# Altium PCB Pico_Main_Board.PcbDoc (part 1 of 2)
Units mil, origin at the board's own origin, x right, y up, seen from the top; angles counter-clockwise.
Board outline 4000 x 3000 mil, 2 copper layers (Top Layer, Bottom Layer); 20 components, 40 nets, 108 pads, 40 vias.
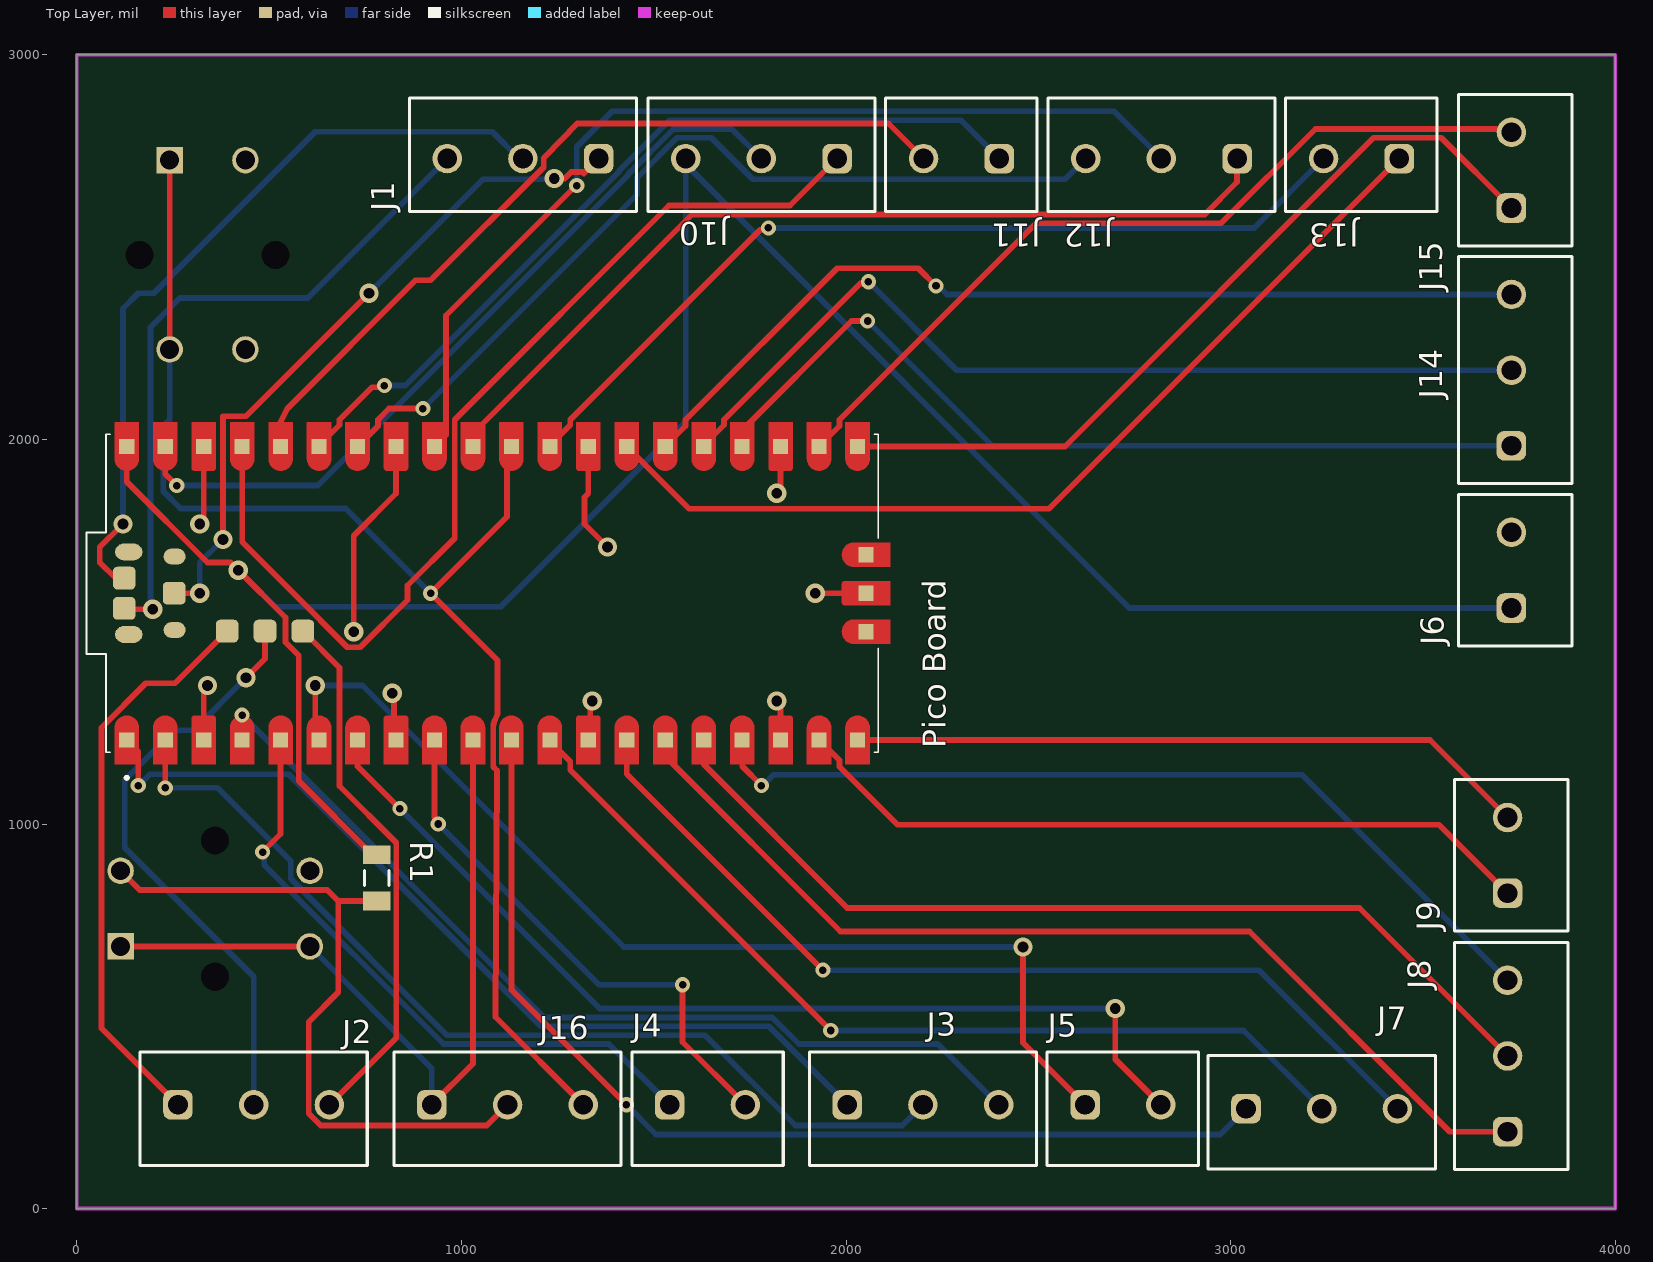
[diagram p0: Top Layer view]
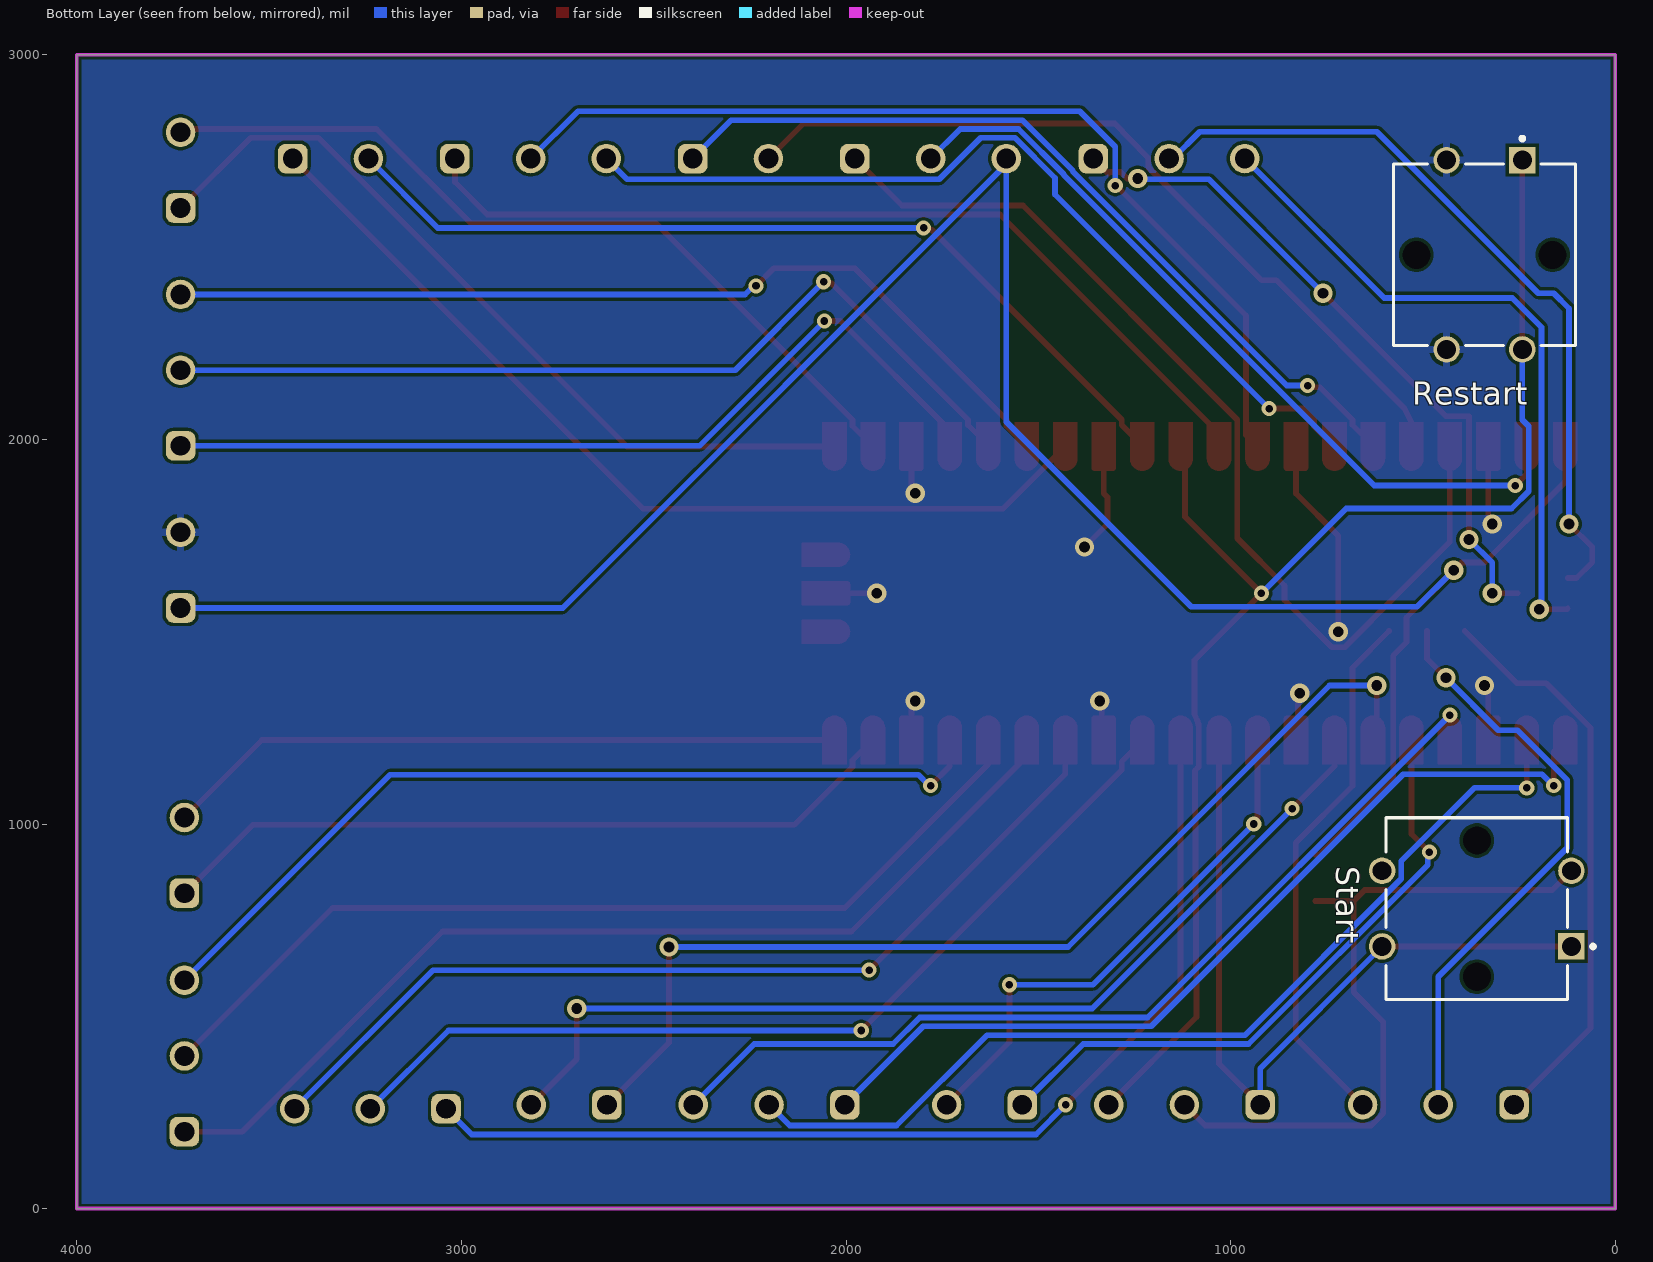
[diagram p1: Bottom Layer view, seen from below]
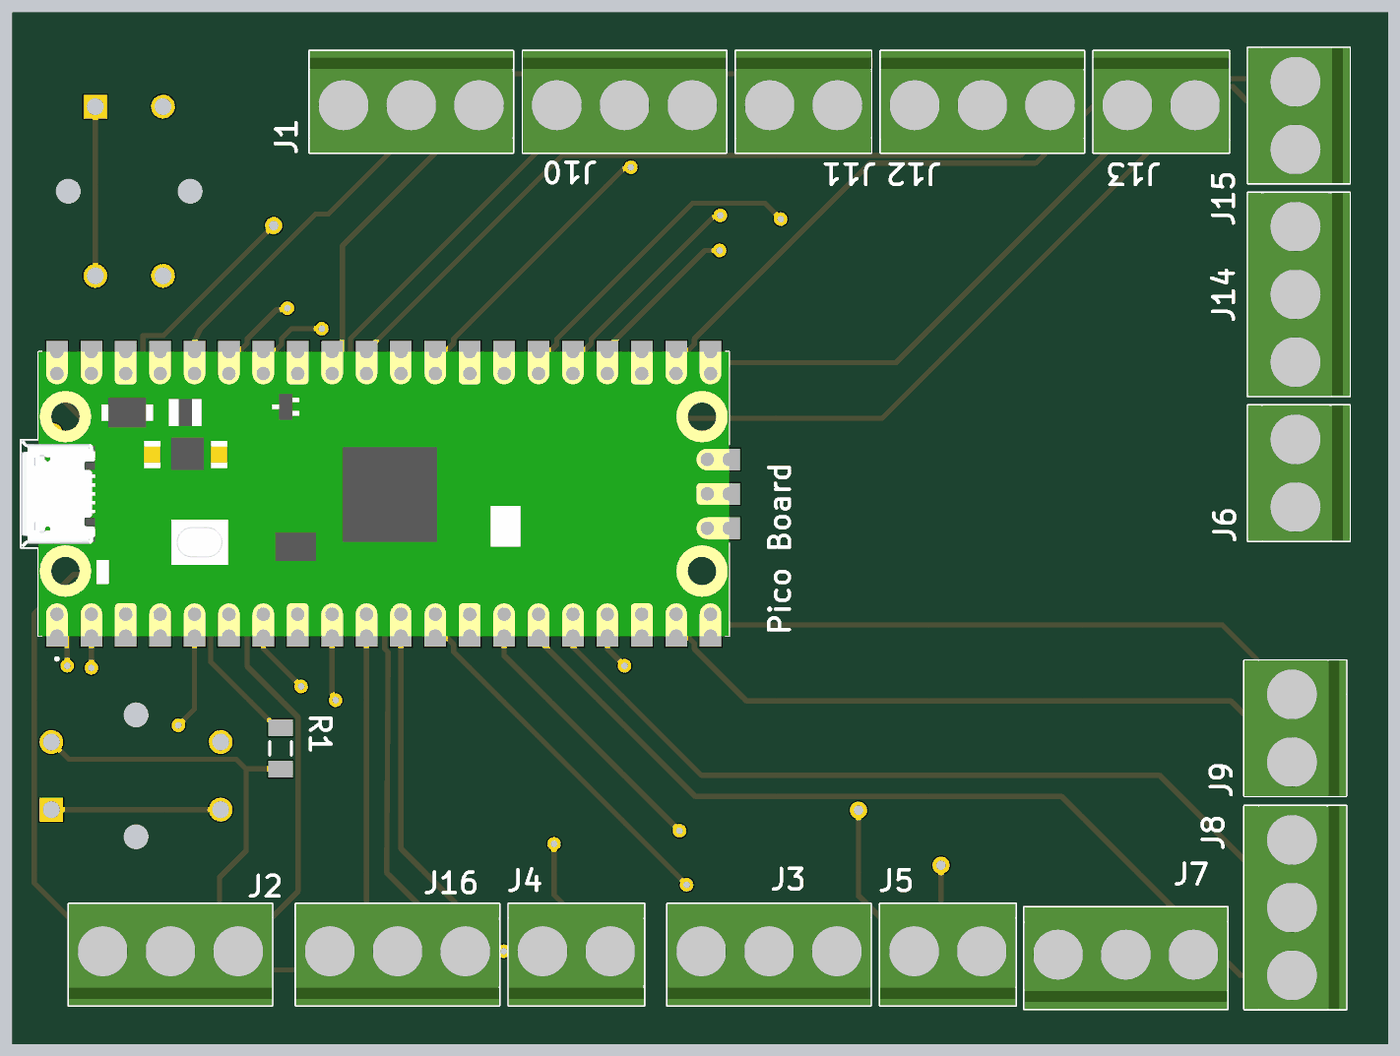
[diagram p3: 3D render of the assembled board from above, using the file's embedded part models]

## Layer stack, top to bottom
Top Solder: solder mask 0.4, Solder Resist, Dk 3.5
Top Layer: signal copper 1.4
Dielectric 1: dielectric 12.6, FR-4, Dk 4.8
Bottom Layer: signal copper 1.4
Bottom Solder: solder mask 0.4, Solder Resist, Dk 3.5

## Board outline
0,0 4000,0 4000,3000 0,3000

## Design rules (kind name [scope] priority, off if disabled: settings)
BoardOutlineClearance [All] p1: gap=7.87 ignorepadtopadclearanceinfootprint=FALSE except(15.75: Arc-SplitBarrior Arc-SplitContinuation Track-SplitBarrior Track-SplitContinuation SMDPad-SplitBarrior SMDPad-SplitContinuation THPad-SplitBarrior THPad-SplitContinuation Via-SplitBarrior Via-SplitContinuation Fill-SplitBarrior Fill-SplitContinuation Poly-SplitBarrior Poly-SplitContinuation Region-SplitBarrior Region-SplitContinuation Text-SplitBarrior Text-SplitContinuation)
Clearance "Clearance Bottom Layer" [OnLayer('Bottom Layer')] p1: gap=8 ignorepadtopadclearanceinfootprint=TRUE except(10: Arc-Text Track-Text SMDPad-Text THPad-Text Via-Text Fill-Text Poly-Text Region-Text Text-Text)
Clearance "Clearance Top Layer" [OnLayer('Top Layer')] p2: gap=8 ignorepadtopadclearanceinfootprint=TRUE except(10: Arc-Text Track-Text SMDPad-Text THPad-Text Via-Text Fill-Text Poly-Text Region-Text Text-Text)
Clearance [All] p3: gap=7.87 ignorepadtopadclearanceinfootprint=FALSE except(3.5: Arc-Arc Arc-Track Arc-SMDPad Track-Track Track-SMDPad SMDPad-SMDPad; 5: Arc-Via Track-Via SMDPad-Via THPad-Via Via-Via; 10: Arc-Text Track-Text SMDPad-Text THPad-Text Via-Text Fill-Text Poly-Text Region-Text Text-Text)
HoleSize [All] p1: absolutevalues=TRUE maxlimit=248.03 minlimit=7.87 maxpercent=80.000 minpercent=20.000
MinimumAnnularRing [All] p1: minimumring=3
MinimumSolderMaskSliver [All] p1: minsoldermaskwidth=3.94
PolygonConnect PolygonConnect_1 [All] p1: thpad.connectstyle=Relief thpad.reliefconductorwidth=20 thpad.reliefentries=4 thpad.polygonreliefangle="90 Angle" thpad.airgapwidth=10 smdpad.connectstyle=Relief smdpad.reliefconductorwidth=20 smdpad.reliefentries=4 smdpad.polygonreliefangle="90 Angle" smdpad.airgapwidth=10 via.connectstyle=Direct via.reliefconductorwidth=20 via.reliefentries=4 via.polygonreliefangle="90 Angle" via.airgapwidth=10
RoutingCorners [All] p1: cornerstyle=Round minsetback=100 maxsetback=100
RoutingVias [All] p1: holewidth=19.68 width=39.37 viastyle="Through Hole" minholewidth=7.87 minwidth=17.72 maxholewidth=39.37 maxwidth=78.74
SilkToSilkClearance [All] p1: silktosilkclearance=3.94
SilkToSolderMaskClearance [IsPad] p1: minsilkscreentomaskgap=3.94 clearancetoexposedcopper=TRUE
SolderMaskExpansion [All] p1: expansion=4 istentingtop=FALSE
Width [All] p1: maxlimit=100 minlimit=3.5 preferedwidth=15
25 further rules are at their usual default settings.

## Components (designator, comment, footprint, x,y, rotation, side; value= is the part's Value field where it differs from the comment)
J1 "691137710003" 691137710003 1160,2740 r180 top
J2 "691137710003" 691137710003 460,260 r0 top
J3 "691137710003" 691137710003 2200,260 r0 top
J4 "691137710002" 691137710002 1640,260 r0 top
J5 "691137710002" 691137710002 2720,260 r0 top
J6 "691137710002" 691137710002 3740,1660 r90 top
J7 "691137710003" 691137710003 3236.85,250.16 r0 top
J8 "691137710003" 691137710003 3729.84,396.85 r90 top
J9 "691137710002" 691137710002 3729.84,918.43 r90 top
J10 "691137710003" 691137710003 1780,2740 r180 top
J11 "691137710002" 691137710002 2300,2740 r180 top
J12 "691137710003" 691137710003 2820,2740 r180 top
J13 "691137710002" 691137710002 3340,2740 r180 top
J14 "691137710003" 691137710003 3740,2180 r90 top
J15 "691137710002" 691137710002 3740,2700 r90 top
J16 "691137710003" 691137710003 1120,260 r0 top
"Pico Board" "SC0915" MODULE_SC0915 1080,1600 r90 top
R1 "10k" RESC3116X65X40ML10T20 780,860 r270 top
Restart "B3F-4055" OMRON-B3F-4055_V 340,2480 r270 bottom
Start "B3F-4055" OMRON-B3F-4055_V 360,780 r0 bottom

## Footprints (in the part's own frame and the unit in brackets; to place one, negate y for a bottom-side part, rotate by r counter-clockwise, add the part's x,y. Pads: shape width x height; smd on the part's side, far side on the other; paste and mask are expansions set on the pad)
691137710002 [mm] "Horizontal Cable Entry with Pressure Clamp, pitch 5mm, 02p"
  rrect50% 1.95x1.95 hole 1.3: 1(-2.5,0.25)
  round 1.95 hole 1.3: 2(2.5,0.25)
  silkscreen extent -5,-3.75 5,3.75, body extent -5,-3.75 5,3.75, height 11.6
691137710003 [mm] "Horizontal Cable Entry with Pressure Clamp, pitch 5mm, 03p"
  rrect50% 1.95x1.95 hole 1.3: 1(-5,0.25)
  round 1.95 hole 1.3: 2(0,0.25) 3(5,0.25)
  silkscreen extent -7.5,-3.75 7.5,3.75, body extent -7.5,-3.75 7.5,3.75, height 11.6
MODULE_SC0915 [mm]
  rect 1x1 smd paste-1 mask+0: 1(-9.69,24.13) 2(-9.69,21.59) 3(-9.69,19.05) 4(-9.69,16.51) 5(-9.69,13.97) 6(-9.69,11.43) 7(-9.69,8.89) 8(-9.69,6.35) 9(-9.69,3.81) 10(-9.69,1.27) 11(-9.69,-1.27) 12(-9.69,-3.81) 13(-9.69,-6.35) 14(-9.69,-8.89) 15(-9.69,-11.43) 16(-9.69,-13.97) 17(-9.69,-16.51) 18(-9.69,-19.05) 19(-9.69,-21.59) 20(-9.69,-24.13) 21(9.69,-24.13) 22(9.69,-21.59) 23(9.69,-19.05) 24(9.69,-16.51) 25(9.69,-13.97) 26(9.69,-11.43) 27(9.69,-8.89) 28(9.69,-6.35) 29(9.69,-3.81) 30(9.69,-1.27) 31(9.69,1.27) 32(9.69,3.81) 33(9.69,6.35) 34(9.69,8.89) 35(9.69,11.43) 36(9.69,13.97) 37(9.69,16.51) 38(9.69,19.05) 39(9.69,21.59) 40(9.69,24.13) D1(-2.54,-24.7) D2(0,-24.7) D3(2.54,-24.7)
  oval 1.1x1.8 smd: A(-2.725,24) B(2.725,24)
  oval 1.05x1.45 smd: C(-2.425,20.97) D(2.425,20.97)
  rrect40% 1.5x1.5 smd: TP1(0,21) TP2(1,24.3) TP3(-1,24.3) TP4(-2.5,17.5) TP5(-2.5,15) TP6(-2.5,12.5)
  Top Layer region: -8.848,24.929 -8.806,24.926 -8.765,24.92 -8.724,24.913 -8.683,24.903 -8.643,24.891 -8.603,24.877 -8.565,24.861 -8.527,24.843 -8.49,24.823 -8.454,24.801 -8.42,24.777 -8.387,24.752 -8.355,24.725 -8.324,24.696 -8.295,24.665 -8.268,24.633 -8.243,24.6 -8.219,24.566 -8.197,24.53 -8.177,24.493 -8.159,24.455 -8.143,24.417 -8.129,24.377 -8.117,24.337 -8.107,24.296 -8.1,24.255 -8.094,24.214 -8.091,24.172 -8.09,24.13 -8.091,24.088 -8.094,24.046 -8.1,24.005 -8.107,23.964 -8.117,23.923 -8.129,23.883 -8.143,23.843 -8.159,23.805 -8.177,23.767 -8.197,23.73 -8.219,23.694 -8.243,23.66 -8.268,23.627 -8.295,23.595 -8.324,23.564 -8.355,23.535 -8.387,23.508 -8.42,23.483 -8.454,23.459 -8.49,23.437 -8.527,23.417 -8.565,23.399 -8.603,23.383 -8.643,23.369 -8.683,23.357 -8.724,23.347 -8.765,23.34 -8.806,23.334 -8.848,23.331 -8.89,23.33 -11.29,23.33 -11.29,24.93 -8.89,24.93
  Top Layer region: 2.582,-23.101 2.624,-23.104 2.665,-23.11 2.706,-23.117 2.747,-23.127 2.787,-23.139 2.827,-23.153 2.865,-23.169 2.903,-23.187 2.94,-23.207 2.976,-23.229 3.01,-23.253 3.043,-23.278 3.075,-23.305 3.106,-23.334 3.135,-23.365 3.162,-23.397 3.187,-23.43 3.211,-23.464 3.233,-23.5 3.253,-23.537 3.271,-23.575 3.287,-23.613 3.301,-23.653 3.313,-23.693 3.323,-23.734 3.33,-23.775 3.336,-23.816 3.339,-23.858 3.34,-23.9 3.34,-26.3 1.74,-26.3 1.74,-23.9 1.741,-23.858 1.744,-23.816 1.75,-23.775 1.757,-23.734 1.767,-23.693 1.779,-23.653 1.793,-23.613 1.809,-23.575 1.827,-23.537 1.847,-23.5 1.869,-23.464 1.893,-23.43 1.918,-23.397 1.945,-23.365 1.974,-23.334 2.005,-23.305 2.037,-23.278 2.07,-23.253 2.104,-23.229 2.14,-23.207 2.177,-23.187 2.215,-23.169 2.253,-23.153 2.293,-23.139 2.333,-23.127 2.374,-23.117 2.415,-23.11 2.456,-23.104 2.498,-23.101 2.54,-23.1
  Top Layer region: 0.621,-23.101 0.631,-23.102 0.642,-23.104 0.652,-23.107 0.662,-23.11 0.672,-23.113 0.681,-23.117 0.691,-23.122 0.7,-23.127 0.709,-23.132 0.718,-23.138 0.726,-23.145 0.734,-23.151 0.741,-23.159 0.749,-23.166 0.755,-23.174 0.762,-23.182 0.768,-23.191 0.773,-23.2 0.778,-23.209 0.783,-23.219 0.787,-23.228 0.79,-23.238 0.793,-23.248 0.796,-23.258 0.798,-23.269 0.799,-23.279 0.8,-23.29 0.8,-23.3 0.8,-26.3 -0.8,-26.3 -0.8,-23.3 -0.8,-23.29 -0.799,-23.279 -0.798,-23.269 -0.796,-23.258 -0.793,-23.248 -0.79,-23.238 -0.787,-23.228 -0.783,-23.219 -0.778,-23.209 -0.773,-23.2 -0.768,-23.191 -0.762,-23.182 -0.755,-23.174 -0.749,-23.166 -0.741,-23.159 -0.734,-23.151 -0.726,-23.145 -0.718,-23.138 -0.709,-23.132 -0.7,-23.127 -0.691,-23.122 -0.681,-23.117 -0.672,-23.113 -0.662,-23.11 -0.652,-23.107 -0.642,-23.104 -0.631,-23.102 -0.621,-23.101 -0.61,-23.1 0.61,-23.1
  Top Layer region: -2.498,-23.101 -2.456,-23.104 -2.415,-23.11 -2.374,-23.117 -2.333,-23.127 -2.293,-23.139 -2.253,-23.153 -2.215,-23.169 -2.177,-23.187 -2.14,-23.207 -2.104,-23.229 -2.07,-23.253 -2.037,-23.278 -2.005,-23.305 -1.974,-23.334 -1.945,-23.365 -1.918,-23.397 -1.893,-23.43 -1.869,-23.464 -1.847,-23.5 -1.827,-23.537 -1.809,-23.575 -1.793,-23.613 -1.779,-23.653 -1.767,-23.693 -1.757,-23.734 -1.75,-23.775 -1.744,-23.816 -1.741,-23.858 -1.74,-23.9 -1.74,-26.3 -3.34,-26.3 -3.34,-23.9 -3.339,-23.858 -3.336,-23.816 -3.33,-23.775 -3.323,-23.734 -3.313,-23.693 -3.301,-23.653 -3.287,-23.613 -3.271,-23.575 -3.253,-23.537 -3.233,-23.5 -3.211,-23.464 -3.187,-23.43 -3.162,-23.397 -3.135,-23.365 -3.106,-23.334 -3.075,-23.305 -3.043,-23.278 -3.01,-23.253 -2.976,-23.229 -2.94,-23.207 -2.903,-23.187 -2.865,-23.169 -2.827,-23.153 -2.787,-23.139 -2.747,-23.127 -2.706,-23.117 -2.665,-23.11 -2.624,-23.104 -2.582,-23.101 -2.54,-23.1
  Top Layer region: 11.29,-19.85 8.28,-19.85 8.269,-19.849 8.259,-19.848 8.248,-19.846 8.238,-19.843 8.228,-19.84 8.218,-19.837 8.209,-19.833 8.199,-19.828 8.19,-19.823 8.181,-19.818 8.172,-19.812 8.164,-19.805 8.156,-19.799 8.149,-19.791 8.141,-19.784 8.135,-19.776 8.128,-19.768 8.122,-19.759 8.117,-19.75 8.112,-19.741 8.107,-19.731 8.103,-19.722 8.1,-19.712 8.097,-19.702 8.094,-19.692 8.092,-19.681 8.091,-19.671 8.09,-19.66 8.09,-19.65 8.09,-18.45 8.09,-18.44 8.091,-18.429 8.092,-18.419 8.094,-18.408 8.097,-18.398 8.1,-18.388 8.103,-18.378 8.107,-18.369 8.112,-18.359 8.117,-18.35 8.122,-18.341 8.128,-18.332 8.135,-18.324 8.141,-18.316 8.149,-18.309 8.156,-18.301 8.164,-18.295 8.172,-18.288 8.181,-18.282 8.19,-18.277 8.199,-18.272 8.209,-18.267 8.218,-18.263 8.228,-18.26 8.238,-18.257 8.248,-18.254 8.259,-18.252 8.269,-18.251 8.28,-18.25 11.29,-18.25
  Top Layer region: 11.29,5.55 8.28,5.55 8.269,5.551 8.259,5.552 8.248,5.554 8.238,5.557 8.228,5.56 8.218,5.563 8.209,5.567 8.199,5.572 8.19,5.577 8.181,5.582 8.172,5.588 8.164,5.595 8.156,5.601 8.149,5.609 8.141,5.616 8.135,5.624 8.128,5.632 8.122,5.641 8.117,5.65 8.112,5.659 8.107,5.669 8.103,5.678 8.1,5.688 8.097,5.698 8.094,5.708 8.092,5.719 8.091,5.729 8.09,5.74 8.09,5.75 8.09,6.95 8.09,6.96 8.091,6.971 8.092,6.981 8.094,6.992 8.097,7.002 8.1,7.012 8.103,7.022 8.107,7.031 8.112,7.041 8.117,7.05 8.122,7.059 8.128,7.068 8.135,7.076 8.141,7.084 8.149,7.091 8.156,7.099 8.164,7.105 8.172,7.112 8.181,7.118 8.19,7.123 8.199,7.128 8.209,7.133 8.218,7.137 8.228,7.14 8.238,7.143 8.248,7.146 8.259,7.148 8.269,7.149 8.28,7.15 11.29,7.15
  Top Layer region: 11.29,-24.93 8.89,-24.93 8.848,-24.929 8.806,-24.926 8.765,-24.92 8.724,-24.913 8.683,-24.903 8.643,-24.891 8.603,-24.877 8.565,-24.861 8.527,-24.843 8.49,-24.823 8.454,-24.801 8.42,-24.777 8.387,-24.752 8.355,-24.725 8.324,-24.696 8.295,-24.665 8.268,-24.633 8.243,-24.6 8.219,-24.566 8.197,-24.53 8.177,-24.493 8.159,-24.455 8.143,-24.417 8.129,-24.377 8.117,-24.337 8.107,-24.296 8.1,-24.255 8.094,-24.214 8.091,-24.172 8.09,-24.13 8.091,-24.088 8.094,-24.046 8.1,-24.005 8.107,-23.964 8.117,-23.923 8.129,-23.883 8.143,-23.843 8.159,-23.805 8.177,-23.767 8.197,-23.73 8.219,-23.694 8.243,-23.66 8.268,-23.627 8.295,-23.595 8.324,-23.564 8.355,-23.535 8.387,-23.508 8.42,-23.483 8.454,-23.459 8.49,-23.437 8.527,-23.417 8.565,-23.399 8.603,-23.383 8.643,-23.369 8.683,-23.357 8.724,-23.347 8.765,-23.34 8.806,-23.334 8.848,-23.331 8.89,-23.33 11.29,-23.33
  Top Layer region: 11.29,-22.39 8.89,-22.39 8.848,-22.389 8.806,-22.386 8.765,-22.38 8.724,-22.373 8.683,-22.363 8.643,-22.351 8.603,-22.337 8.565,-22.321 8.527,-22.303 8.49,-22.283 8.454,-22.261 8.42,-22.237 8.387,-22.212 8.355,-22.185 8.324,-22.156 8.295,-22.125 8.268,-22.093 8.243,-22.06 8.219,-22.026 8.197,-21.99 8.177,-21.953 8.159,-21.915 8.143,-21.877 8.129,-21.837 8.117,-21.797 8.107,-21.756 8.1,-21.715 8.094,-21.674 8.091,-21.632 8.09,-21.59 8.091,-21.548 8.094,-21.506 8.1,-21.465 8.107,-21.424 8.117,-21.383 8.129,-21.343 8.143,-21.303 8.159,-21.265 8.177,-21.227 8.197,-21.19 8.219,-21.154 8.243,-21.12 8.268,-21.087 8.295,-21.055 8.324,-21.024 8.355,-20.995 8.387,-20.968 8.42,-20.943 8.454,-20.919 8.49,-20.897 8.527,-20.877 8.565,-20.859 8.603,-20.843 8.643,-20.829 8.683,-20.817 8.724,-20.807 8.765,-20.8 8.806,-20.794 8.848,-20.791 8.89,-20.79 11.29,-20.79
  Top Layer region: 11.29,-17.31 8.89,-17.31 8.848,-17.309 8.806,-17.306 8.765,-17.3 8.724,-17.293 8.683,-17.283 8.643,-17.271 8.603,-17.257 8.565,-17.241 8.527,-17.223 8.49,-17.203 8.454,-17.181 8.42,-17.157 8.387,-17.132 8.355,-17.105 8.324,-17.076 8.295,-17.045 8.268,-17.013 8.243,-16.98 8.219,-16.946 8.197,-16.91 8.177,-16.873 8.159,-16.835 8.143,-16.797 8.129,-16.757 8.117,-16.717 8.107,-16.676 8.1,-16.635 8.094,-16.594 8.091,-16.552 8.09,-16.51 8.091,-16.468 8.094,-16.426 8.1,-16.385 8.107,-16.344 8.117,-16.303 8.129,-16.263 8.143,-16.223 8.159,-16.185 8.177,-16.147 8.197,-16.11 8.219,-16.074 8.243,-16.04 8.268,-16.007 8.295,-15.975 8.324,-15.944 8.355,-15.915 8.387,-15.888 8.42,-15.863 8.454,-15.839 8.49,-15.817 8.527,-15.797 8.565,-15.779 8.603,-15.763 8.643,-15.749 8.683,-15.737 8.724,-15.727 8.765,-15.72 8.806,-15.714 8.848,-15.711 8.89,-15.71 11.29,-15.71
  Top Layer region: 11.29,-14.77 8.89,-14.77 8.848,-14.769 8.806,-14.766 8.765,-14.76 8.724,-14.753 8.683,-14.743 8.643,-14.731 8.603,-14.717 8.565,-14.701 8.527,-14.683 8.49,-14.663 8.454,-14.641 8.42,-14.617 8.387,-14.592 8.355,-14.565 8.324,-14.536 8.295,-14.505 8.268,-14.473 8.243,-14.44 8.219,-14.406 8.197,-14.37 8.177,-14.333 8.159,-14.295 8.143,-14.257 8.129,-14.217 8.117,-14.177 8.107,-14.136 8.1,-14.095 8.094,-14.054 8.091,-14.012 8.09,-13.97 8.091,-13.928 8.094,-13.886 8.1,-13.845 8.107,-13.804 8.117,-13.763 8.129,-13.723 8.143,-13.683 8.159,-13.645 8.177,-13.607 8.197,-13.57 8.219,-13.534 8.243,-13.5 8.268,-13.467 8.295,-13.435 8.324,-13.404 8.355,-13.375 8.387,-13.348 8.42,-13.323 8.454,-13.299 8.49,-13.277 8.527,-13.257 8.565,-13.239 8.603,-13.223 8.643,-13.209 8.683,-13.197 8.724,-13.187 8.765,-13.18 8.806,-13.174 8.848,-13.171 8.89,-13.17 11.29,-13.17
  Top Layer region: 11.29,-12.23 8.89,-12.23 8.848,-12.229 8.806,-12.226 8.765,-12.22 8.724,-12.213 8.683,-12.203 8.643,-12.191 8.603,-12.177 8.565,-12.161 8.527,-12.143 8.49,-12.123 8.454,-12.101 8.42,-12.077 8.387,-12.052 8.355,-12.025 8.324,-11.996 8.295,-11.965 8.268,-11.933 8.243,-11.9 8.219,-11.866 8.197,-11.83 8.177,-11.793 8.159,-11.755 8.143,-11.717 8.129,-11.677 8.117,-11.637 8.107,-11.596 8.1,-11.555 8.094,-11.514 8.091,-11.472 8.09,-11.43 8.091,-11.388 8.094,-11.346 8.1,-11.305 8.107,-11.264 8.117,-11.223 8.129,-11.183 8.143,-11.143 8.159,-11.105 8.177,-11.067 8.197,-11.03 8.219,-10.994 8.243,-10.96 8.268,-10.927 8.295,-10.895 8.324,-10.864 8.355,-10.835 8.387,-10.808 8.42,-10.783 8.454,-10.759 8.49,-10.737 8.527,-10.717 8.565,-10.699 8.603,-10.683 8.643,-10.669 8.683,-10.657 8.724,-10.647 8.765,-10.64 8.806,-10.634 8.848,-10.631 8.89,-10.63 11.29,-10.63
  Top Layer region: 11.29,-9.69 8.89,-9.69 8.848,-9.689 8.806,-9.686 8.765,-9.68 8.724,-9.673 8.683,-9.663 8.643,-9.651 8.603,-9.637 8.565,-9.621 8.527,-9.603 8.49,-9.583 8.454,-9.561 8.42,-9.537 8.387,-9.512 8.355,-9.485 8.324,-9.456 8.295,-9.425 8.268,-9.393 8.243,-9.36 8.219,-9.326 8.197,-9.29 8.177,-9.253 8.159,-9.215 8.143,-9.177 8.129,-9.137 8.117,-9.097 8.107,-9.056 8.1,-9.015 8.094,-8.974 8.091,-8.932 8.09,-8.89 8.091,-8.848 8.094,-8.806 8.1,-8.765 8.107,-8.724 8.117,-8.683 8.129,-8.643 8.143,-8.603 8.159,-8.565 8.177,-8.527 8.197,-8.49 8.219,-8.454 8.243,-8.42 8.268,-8.387 8.295,-8.355 8.324,-8.324 8.355,-8.295 8.387,-8.268 8.42,-8.243 8.454,-8.219 8.49,-8.197 8.527,-8.177 8.565,-8.159 8.603,-8.143 8.643,-8.129 8.683,-8.117 8.724,-8.107 8.765,-8.1 8.806,-8.094 8.848,-8.091 8.89,-8.09 11.29,-8.09
  Top Layer region: 11.29,0.47 8.89,0.47 8.848,0.471 8.806,0.474 8.765,0.48 8.724,0.487 8.683,0.497 8.643,0.509 8.603,0.523 8.565,0.539 8.527,0.557 8.49,0.577 8.454,0.599 8.42,0.623 8.387,0.648 8.355,0.675 8.324,0.704 8.295,0.735 8.268,0.767 8.243,0.8 8.219,0.834 8.197,0.87 8.177,0.907 8.159,0.945 8.143,0.983 8.129,1.023 8.117,1.063 8.107,1.104 8.1,1.145 8.094,1.186 8.091,1.228 8.09,1.27 8.091,1.312 8.094,1.354 8.1,1.395 8.107,1.436 8.117,1.477 8.129,1.517 8.143,1.557 8.159,1.595 8.177,1.633 8.197,1.67 8.219,1.706 8.243,1.74 8.268,1.773 8.295,1.805 8.324,1.836 8.355,1.865 8.387,1.892 8.42,1.917 8.454,1.941 8.49,1.963 8.527,1.983 8.565,2.001 8.603,2.017 8.643,2.031 8.683,2.043 8.724,2.053 8.765,2.06 8.806,2.066 8.848,2.069 8.89,2.07 11.29,2.07
  Top Layer region: 11.29,3.01 8.89,3.01 8.848,3.011 8.806,3.014 8.765,3.02 8.724,3.027 8.683,3.037 8.643,3.049 8.603,3.063 8.565,3.079 8.527,3.097 8.49,3.117 8.454,3.139 8.42,3.163 8.387,3.188 8.355,3.215 8.324,3.244 8.295,3.275 8.268,3.307 8.243,3.34 8.219,3.374 8.197,3.41 8.177,3.447 8.159,3.485 8.143,3.523 8.129,3.563 8.117,3.603 8.107,3.644 8.1,3.685 8.094,3.726 8.091,3.768 8.09,3.81 8.091,3.852 8.094,3.894 8.1,3.935 8.107,3.976 8.117,4.017 8.129,4.057 8.143,4.097 8.159,4.135 8.177,4.173 8.197,4.21 8.219,4.246 8.243,4.28 8.268,4.313 8.295,4.345 8.324,4.376 8.355,4.405 8.387,4.432 8.42,4.457 8.454,4.481 8.49,4.503 8.527,4.523 8.565,4.541 8.603,4.557 8.643,4.571 8.683,4.583 8.724,4.593 8.765,4.6 8.806,4.606 8.848,4.609 8.89,4.61 11.29,4.61
  Top Layer region: 11.29,8.09 8.89,8.09 8.848,8.091 8.806,8.094 8.765,8.1 8.724,8.107 8.683,8.117 8.643,8.129 8.603,8.143 8.565,8.159 8.527,8.177 8.49,8.197 8.454,8.219 8.42,8.243 8.387,8.268 8.355,8.295 8.324,8.324 8.295,8.355 8.268,8.387 8.243,8.42 8.219,8.454 8.197,8.49 8.177,8.527 8.159,8.565 8.143,8.603 8.129,8.643 8.117,8.683 8.107,8.724 8.1,8.765 8.094,8.806 8.091,8.848 8.09,8.89 8.091,8.932 8.094,8.974 8.1,9.015 8.107,9.056 8.117,9.097 8.129,9.137 8.143,9.177 8.159,9.215 8.177,9.253 8.197,9.29 8.219,9.326 8.243,9.36 8.268,9.393 8.295,9.425 8.324,9.456 8.355,9.485 8.387,9.512 8.42,9.537 8.454,9.561 8.49,9.583 8.527,9.603 8.565,9.621 8.603,9.637 8.643,9.651 8.683,9.663 8.724,9.673 8.765,9.68 8.806,9.686 8.848,9.689 8.89,9.69 11.29,9.69
  Top Layer region: 11.29,13.17 8.89,13.17 8.848,13.171 8.806,13.174 8.765,13.18 8.724,13.187 8.683,13.197 8.643,13.209 8.603,13.223 8.565,13.239 8.527,13.257 8.49,13.277 8.454,13.299 8.42,13.323 8.387,13.348 8.355,13.375 8.324,13.404 8.295,13.435 8.268,13.467 8.243,13.5 8.219,13.534 8.197,13.57 8.177,13.607 8.159,13.645 8.143,13.683 8.129,13.723 8.117,13.763 8.107,13.804 8.1,13.845 8.094,13.886 8.091,13.928 8.09,13.97 8.091,14.012 8.094,14.054 8.1,14.095 8.107,14.136 8.117,14.177 8.129,14.217 8.143,14.257 8.159,14.295 8.177,14.333 8.197,14.37 8.219,14.406 8.243,14.44 8.268,14.473 8.295,14.505 8.324,14.536 8.355,14.565 8.387,14.592 8.42,14.617 8.454,14.641 8.49,14.663 8.527,14.683 8.565,14.701 8.603,14.717 8.643,14.731 8.683,14.743 8.724,14.753 8.765,14.76 8.806,14.766 8.848,14.769 8.89,14.77 11.29,14.77
  Top Layer region: 11.29,15.71 8.89,15.71 8.848,15.711 8.806,15.714 8.765,15.72 8.724,15.727 8.683,15.737 8.643,15.749 8.603,15.763 8.565,15.779 8.527,15.797 8.49,15.817 8.454,15.839 8.42,15.863 8.387,15.888 8.355,15.915 8.324,15.944 8.295,15.975 8.268,16.007 8.243,16.04 8.219,16.074 8.197,16.11 8.177,16.147 8.159,16.185 8.143,16.223 8.129,16.263 8.117,16.303 8.107,16.344 8.1,16.385 8.094,16.426 8.091,16.468 8.09,16.51 8.091,16.552 8.094,16.594 8.1,16.635 8.107,16.676 8.117,16.717 8.129,16.757 8.143,16.797 8.159,16.835 8.177,16.873 8.197,16.91 8.219,16.946 8.243,16.98 8.268,17.013 8.295,17.045 8.324,17.076 8.355,17.105 8.387,17.132 8.42,17.157 8.454,17.181 8.49,17.203 8.527,17.223 8.565,17.241 8.603,17.257 8.643,17.271 8.683,17.283 8.724,17.293 8.765,17.3 8.806,17.306 8.848,17.309 8.89,17.31 11.29,17.31
  Top Layer region: 11.29,23.33 8.89,23.33 8.848,23.331 8.806,23.334 8.765,23.34 8.724,23.347 8.683,23.357 8.643,23.369 8.603,23.383 8.565,23.399 8.527,23.417 8.49,23.437 8.454,23.459 8.42,23.483 8.387,23.508 8.355,23.535 8.324,23.564 8.295,23.595 8.268,23.627 8.243,23.66 8.219,23.694 8.197,23.73 8.177,23.767 8.159,23.805 8.143,23.843 8.129,23.883 8.117,23.923 8.107,23.964 8.1,24.005 8.094,24.046 8.091,24.088 8.09,24.13 8.091,24.172 8.094,24.214 8.1,24.255 8.107,24.296 8.117,24.337 8.129,24.377 8.143,24.417 8.159,24.455 8.177,24.493 8.197,24.53 8.219,24.566 8.243,24.6 8.268,24.633 8.295,24.665 8.324,24.696 8.355,24.725 8.387,24.752 8.42,24.777 8.454,24.801 8.49,24.823 8.527,24.843 8.565,24.861 8.603,24.877 8.643,24.891 8.683,24.903 8.724,24.913 8.765,24.92 8.806,24.926 8.848,24.929 8.89,24.93 11.29,24.93
  Top Layer region: 11.29,-7.15 8.28,-7.15 8.269,-7.149 8.259,-7.148 8.248,-7.146 8.238,-7.143 8.228,-7.14 8.218,-7.137 8.209,-7.133 8.199,-7.128 8.19,-7.123 8.181,-7.118 8.172,-7.112 8.164,-7.105 8.156,-7.099 8.149,-7.091 8.141,-7.084 8.135,-7.076 8.128,-7.068 8.122,-7.059 8.117,-7.05 8.112,-7.041 8.107,-7.031 8.103,-7.022 8.1,-7.012 8.097,-7.002 8.094,-6.992 8.092,-6.981 8.091,-6.971 8.09,-6.96 8.09,-6.95 8.09,-5.75 8.09,-5.74 8.091,-5.729 8.092,-5.719 8.094,-5.708 8.097,-5.698 8.1,-5.688 8.103,-5.678 8.107,-5.669 8.112,-5.659 8.117,-5.65 8.122,-5.641 8.128,-5.632 8.135,-5.624 8.141,-5.616 8.149,-5.609 8.156,-5.601 8.164,-5.595 8.172,-5.588 8.181,-5.582 8.19,-5.577 8.199,-5.572 8.209,-5.567 8.218,-5.563 8.228,-5.56 8.238,-5.557 8.248,-5.554 8.259,-5.552 8.269,-5.551 8.28,-5.55 11.29,-5.55
  Top Layer region: 11.29,-4.61 8.89,-4.61 8.848,-4.609 8.806,-4.606 8.765,-4.6 8.724,-4.593 8.683,-4.583 8.643,-4.571 8.603,-4.557 8.565,-4.541 8.527,-4.523 8.49,-4.503 8.454,-4.481 8.42,-4.457 8.387,-4.432 8.355,-4.405 8.324,-4.376 8.295,-4.345 8.268,-4.313 8.243,-4.28 8.219,-4.246 8.197,-4.21 8.177,-4.173 8.159,-4.135 8.143,-4.097 8.129,-4.057 8.117,-4.017 8.107,-3.976 8.1,-3.935 8.094,-3.894 8.091,-3.852 8.09,-3.81 8.091,-3.768 8.094,-3.726 8.1,-3.685 8.107,-3.644 8.117,-3.603 8.129,-3.563 8.143,-3.523 8.159,-3.485 8.177,-3.447 8.197,-3.41 8.219,-3.374 8.243,-3.34 8.268,-3.307 8.295,-3.275 8.324,-3.244 8.355,-3.215 8.387,-3.188 8.42,-3.163 8.454,-3.139 8.49,-3.117 8.527,-3.097 8.565,-3.079 8.603,-3.063 8.643,-3.049 8.683,-3.037 8.724,-3.027 8.765,-3.02 8.806,-3.014 8.848,-3.011 8.89,-3.01 11.29,-3.01
  Top Layer region: 11.29,-2.07 8.89,-2.07 8.848,-2.069 8.806,-2.066 8.765,-2.06 8.724,-2.053 8.683,-2.043 8.643,-2.031 8.603,-2.017 8.565,-2.001 8.527,-1.983 8.49,-1.963 8.454,-1.941 8.42,-1.917 8.387,-1.892 8.355,-1.865 8.324,-1.836 8.295,-1.805 8.268,-1.773 8.243,-1.74 8.219,-1.706 8.197,-1.67 8.177,-1.633 8.159,-1.595 8.143,-1.557 8.129,-1.517 8.117,-1.477 8.107,-1.436 8.1,-1.395 8.094,-1.354 8.091,-1.312 8.09,-1.27 8.091,-1.228 8.094,-1.186 8.1,-1.145 8.107,-1.104 8.117,-1.063 8.129,-1.023 8.143,-0.983 8.159,-0.945 8.177,-0.907 8.197,-0.87 8.219,-0.834 8.243,-0.8 8.268,-0.767 8.295,-0.735 8.324,-0.704 8.355,-0.675 8.387,-0.648 8.42,-0.623 8.454,-0.599 8.49,-0.577 8.527,-0.557 8.565,-0.539 8.603,-0.523 8.643,-0.509 8.683,-0.497 8.724,-0.487 8.765,-0.48 8.806,-0.474 8.848,-0.471 8.89,-0.47 11.29,-0.47
  Top Layer region: 11.29,10.63 8.89,10.63 8.848,10.631 8.806,10.634 8.765,10.64 8.724,10.647 8.683,10.657 8.643,10.669 8.603,10.683 8.565,10.699 8.527,10.717 8.49,10.737 8.454,10.759 8.42,10.783 8.387,10.808 8.355,10.835 8.324,10.864 8.295,10.895 8.268,10.927 8.243,10.96 8.219,10.994 8.197,11.03 8.177,11.067 8.159,11.105 8.143,11.143 8.129,11.183 8.117,11.223 8.107,11.264 8.1,11.305 8.094,11.346 8.091,11.388 8.09,11.43 8.091,11.472 8.094,11.514 8.1,11.555 8.107,11.596 8.117,11.637 8.129,11.677 8.143,11.717 8.159,11.755 8.177,11.793 8.197,11.83 8.219,11.866 8.243,11.9 8.268,11.933 8.295,11.965 8.324,11.996 8.355,12.025 8.387,12.052 8.42,12.077 8.454,12.101 8.49,12.123 8.527,12.143 8.565,12.161 8.603,12.177 8.643,12.191 8.683,12.203 8.724,12.213 8.765,12.22 8.806,12.226 8.848,12.229 8.89,12.23 11.29,12.23
  Top Layer region: 11.29,20.79 8.89,20.79 8.848,20.791 8.806,20.794 8.765,20.8 8.724,20.807 8.683,20.817 8.643,20.829 8.603,20.843 8.565,20.859 8.527,20.877 8.49,20.897 8.454,20.919 8.42,20.943 8.387,20.968 8.355,20.995 8.324,21.024 8.295,21.055 8.268,21.087 8.243,21.12 8.219,21.154 8.197,21.19 8.177,21.227 8.159,21.265 8.143,21.303 8.129,21.343 8.117,21.383 8.107,21.424 8.1,21.465 8.094,21.506 8.091,21.548 8.09,21.59 8.091,21.632 8.094,21.674 8.1,21.715 8.107,21.756 8.117,21.797 8.129,21.837 8.143,21.877 8.159,21.915 8.177,21.953 8.197,21.99 8.219,22.026 8.243,22.06 8.268,22.093 8.295,22.125 8.324,22.156 8.355,22.185 8.387,22.212 8.42,22.237 8.454,22.261 8.49,22.283 8.527,22.303 8.565,22.321 8.603,22.337 8.643,22.351 8.683,22.363 8.724,22.373 8.765,22.38 8.806,22.386 8.848,22.389 8.89,22.39 11.29,22.39
  Top Layer region: 11.29,18.25 8.28,18.25 8.269,18.251 8.259,18.252 8.248,18.254 8.238,18.257 8.228,18.26 8.218,18.263 8.209,18.267 8.199,18.272 8.19,18.277 8.181,18.282 8.172,18.288 8.164,18.295 8.156,18.301 8.149,18.309 8.141,18.316 8.135,18.324 8.128,18.332 8.122,18.341 8.117,18.35 8.112,18.359 8.107,18.369 8.103,18.378 8.1,18.388 8.097,18.398 8.094,18.408 8.092,18.419 8.091,18.429 8.09,18.44 8.09,18.45 8.09,19.65 8.09,19.66 8.091,19.671 8.092,19.681 8.094,19.692 8.097,19.702 8.1,19.712 8.103,19.722 8.107,19.731 8.112,19.741 8.117,19.75 8.122,19.759 8.128,19.768 8.135,19.776 8.141,19.784 8.149,19.791 8.156,19.799 8.164,19.805 8.172,19.812 8.181,19.818 8.19,19.823 8.199,19.828 8.209,19.833 8.218,19.837 8.228,19.84 8.238,19.843 8.248,19.846 8.259,19.848 8.269,19.849 8.28,19.85 11.29,19.85
  Top Layer region: -8.848,9.689 -8.806,9.686 -8.765,9.68 -8.724,9.673 -8.683,9.663 -8.643,9.651 -8.603,9.637 -8.565,9.621 -8.527,9.603 -8.49,9.583 -8.454,9.561 -8.42,9.537 -8.387,9.512 -8.355,9.485 -8.324,9.456 -8.295,9.425 -8.268,9.393 -8.243,9.36 -8.219,9.326 -8.197,9.29 -8.177,9.253 -8.159,9.215 -8.143,9.177 -8.129,9.137 -8.117,9.097 -8.107,9.056 -8.1,9.015 -8.094,8.974 -8.091,8.932 -8.09,8.89 -8.091,8.848 -8.094,8.806 -8.1,8.765 -8.107,8.724 -8.117,8.683 -8.129,8.643 -8.143,8.603 -8.159,8.565 -8.177,8.527 -8.197,8.49 -8.219,8.454 -8.243,8.42 -8.268,8.387 -8.295,8.355 -8.324,8.324 -8.355,8.295 -8.387,8.268 -8.42,8.243 -8.454,8.219 -8.49,8.197 -8.527,8.177 -8.565,8.159 -8.603,8.143 -8.643,8.129 -8.683,8.117 -8.724,8.107 -8.765,8.1 -8.806,8.094 -8.848,8.091 -8.89,8.09 -11.29,8.09 -11.29,9.69 -8.89,9.69
  Top Layer region: -8.848,12.229 -8.806,12.226 -8.765,12.22 -8.724,12.213 -8.683,12.203 -8.643,12.191 -8.603,12.177 -8.565,12.161 -8.527,12.143 -8.49,12.123 -8.454,12.101 -8.42,12.077 -8.387,12.052 -8.355,12.025 -8.324,11.996 -8.295,11.965 -8.268,11.933 -8.243,11.9 -8.219,11.866 -8.197,11.83 -8.177,11.793 -8.159,11.755 -8.143,11.717 -8.129,11.677 -8.117,11.637 -8.107,11.596 -8.1,11.555 -8.094,11.514 -8.091,11.472 -8.09,11.43 -8.091,11.388 -8.094,11.346 -8.1,11.305 -8.107,11.264 -8.117,11.223 -8.129,11.183 -8.143,11.143 -8.159,11.105 -8.177,11.067 -8.197,11.03 -8.219,10.994 -8.243,10.96 -8.268,10.927 -8.295,10.895 -8.324,10.864 -8.355,10.835 -8.387,10.808 -8.42,10.783 -8.454,10.759 -8.49,10.737 -8.527,10.717 -8.565,10.699 -8.603,10.683 -8.643,10.669 -8.683,10.657 -8.724,10.647 -8.765,10.64 -8.806,10.634 -8.848,10.631 -8.89,10.63 -11.29,10.63 -11.29,12.23 -8.89,12.23
  Top Layer region: -8.848,14.769 -8.806,14.766 -8.765,14.76 -8.724,14.753 -8.683,14.743 -8.643,14.731 -8.603,14.717 -8.565,14.701 -8.527,14.683 -8.49,14.663 -8.454,14.641 -8.42,14.617 -8.387,14.592 -8.355,14.565 -8.324,14.536 -8.295,14.505 -8.268,14.473 -8.243,14.44 -8.219,14.406 -8.197,14.37 -8.177,14.333 -8.159,14.295 -8.143,14.257 -8.129,14.217 -8.117,14.177 -8.107,14.136 -8.1,14.095 -8.094,14.054 -8.091,14.012 -8.09,13.97 -8.091,13.928 -8.094,13.886 -8.1,13.845 -8.107,13.804 -8.117,13.763 -8.129,13.723 -8.143,13.683 -8.159,13.645 -8.177,13.607 -8.197,13.57 -8.219,13.534 -8.243,13.5 -8.268,13.467 -8.295,13.435 -8.324,13.404 -8.355,13.375 -8.387,13.348 -8.42,13.323 -8.454,13.299 -8.49,13.277 -8.527,13.257 -8.565,13.239 -8.603,13.223 -8.643,13.209 -8.683,13.197 -8.724,13.187 -8.765,13.18 -8.806,13.174 -8.848,13.171 -8.89,13.17 -11.29,13.17 -11.29,14.77 -8.89,14.77
  Top Layer region: -8.848,17.309 -8.806,17.306 -8.765,17.3 -8.724,17.293 -8.683,17.283 -8.643,17.271 -8.603,17.257 -8.565,17.241 -8.527,17.223 -8.49,17.203 -8.454,17.181 -8.42,17.157 -8.387,17.132 -8.355,17.105 -8.324,17.076 -8.295,17.045 -8.268,17.013 -8.243,16.98 -8.219,16.946 -8.197,16.91 -8.177,16.873 -8.159,16.835 -8.143,16.797 -8.129,16.757 -8.117,16.717 -8.107,16.676 -8.1,16.635 -8.094,16.594 -8.091,16.552 -8.09,16.51 -8.091,16.468 -8.094,16.426 -8.1,16.385 -8.107,16.344 -8.117,16.303 -8.129,16.263 -8.143,16.223 -8.159,16.185 -8.177,16.147 -8.197,16.11 -8.219,16.074 -8.243,16.04 -8.268,16.007 -8.295,15.975 -8.324,15.944 -8.355,15.915 -8.387,15.888 -8.42,15.863 -8.454,15.839 -8.49,15.817 -8.527,15.797 -8.565,15.779 -8.603,15.763 -8.643,15.749 -8.683,15.737 -8.724,15.727 -8.765,15.72 -8.806,15.714 -8.848,15.711 -8.89,15.71 -11.29,15.71 -11.29,17.31 -8.89,17.31
  Top Layer region: -8.848,22.389 -8.806,22.386 -8.765,22.38 -8.724,22.373 -8.683,22.363 -8.643,22.351 -8.603,22.337 -8.565,22.321 -8.527,22.303 -8.49,22.283 -8.454,22.261 -8.42,22.237 -8.387,22.212 -8.355,22.185 -8.324,22.156 -8.295,22.125 -8.268,22.093 -8.243,22.06 -8.219,22.026 -8.197,21.99 -8.177,21.953 -8.159,21.915 -8.143,21.877 -8.129,21.837 -8.117,21.797 -8.107,21.756 -8.1,21.715 -8.094,21.674 -8.091,21.632 -8.09,21.59 -8.091,21.548 -8.094,21.506 -8.1,21.465 -8.107,21.424 -8.117,21.383 -8.129,21.343 -8.143,21.303 -8.159,21.265 -8.177,21.227 -8.197,21.19 -8.219,21.154 -8.243,21.12 -8.268,21.087 -8.295,21.055 -8.324,21.024 -8.355,20.995 -8.387,20.968 -8.42,20.943 -8.454,20.919 -8.49,20.897 -8.527,20.877 -8.565,20.859 -8.603,20.843 -8.643,20.829 -8.683,20.817 -8.724,20.807 -8.765,20.8 -8.806,20.794 -8.848,20.791 -8.89,20.79 -11.29,20.79 -11.29,22.39 -8.89,22.39
  Top Layer region: -8.269,-18.251 -8.259,-18.252 -8.248,-18.254 -8.238,-18.257 -8.228,-18.26 -8.218,-18.263 -8.209,-18.267 -8.199,-18.272 -8.19,-18.277 -8.181,-18.282 -8.172,-18.288 -8.164,-18.295 -8.156,-18.301 -8.149,-18.309 -8.141,-18.316 -8.135,-18.324 -8.128,-18.332 -8.122,-18.341 -8.117,-18.35 -8.112,-18.359 -8.107,-18.369 -8.103,-18.378 -8.1,-18.388 -8.097,-18.398 -8.094,-18.408 -8.092,-18.419 -8.091,-18.429 -8.09,-18.44 -8.09,-18.45 -8.09,-19.65 -8.09,-19.66 -8.091,-19.671 -8.092,-19.681 -8.094,-19.692 -8.097,-19.702 -8.1,-19.712 -8.103,-19.722 -8.107,-19.731 -8.112,-19.741 -8.117,-19.75 -8.122,-19.759 -8.128,-19.768 -8.135,-19.776 -8.141,-19.784 -8.149,-19.791 -8.156,-19.799 -8.164,-19.805 -8.172,-19.812 -8.181,-19.818 -8.19,-19.823 -8.199,-19.828 -8.209,-19.833 -8.218,-19.837 -8.228,-19.84 -8.238,-19.843 -8.248,-19.846 -8.259,-19.848 -8.269,-19.849 -8.28,-19.85 -11.29,-19.85 -11.29,-18.25 -8.28,-18.25
  Top Layer region: -8.269,-5.551 -8.259,-5.552 -8.248,-5.554 -8.238,-5.557 -8.228,-5.56 -8.218,-5.563 -8.209,-5.567 -8.199,-5.572 -8.19,-5.577 -8.181,-5.582 -8.172,-5.588 -8.164,-5.595 -8.156,-5.601 -8.149,-5.609 -8.141,-5.616 -8.135,-5.624 -8.128,-5.632 -8.122,-5.641 -8.117,-5.65 -8.112,-5.659 -8.107,-5.669 -8.103,-5.678 -8.1,-5.688 -8.097,-5.698 -8.094,-5.708 -8.092,-5.719 -8.091,-5.729 -8.09,-5.74 -8.09,-5.75 -8.09,-6.95 -8.09,-6.96 -8.091,-6.971 -8.092,-6.981 -8.094,-6.992 -8.097,-7.002 -8.1,-7.012 -8.103,-7.022 -8.107,-7.031 -8.112,-7.041 -8.117,-7.05 -8.122,-7.059 -8.128,-7.068 -8.135,-7.076 -8.141,-7.084 -8.149,-7.091 -8.156,-7.099 -8.164,-7.105 -8.172,-7.112 -8.181,-7.118 -8.19,-7.123 -8.199,-7.128 -8.209,-7.133 -8.218,-7.137 -8.228,-7.14 -8.238,-7.143 -8.248,-7.146 -8.259,-7.148 -8.269,-7.149 -8.28,-7.15 -11.29,-7.15 -11.29,-5.55 -8.28,-5.55
  Top Layer region: -8.269,7.149 -8.259,7.148 -8.248,7.146 -8.238,7.143 -8.228,7.14 -8.218,7.137 -8.209,7.133 -8.199,7.128 -8.19,7.123 -8.181,7.118 -8.172,7.112 -8.164,7.105 -8.156,7.099 -8.149,7.091 -8.141,7.084 -8.135,7.076 -8.128,7.068 -8.122,7.059 -8.117,7.05 -8.112,7.041 -8.107,7.031 -8.103,7.022 -8.1,7.012 -8.097,7.002 -8.094,6.992 -8.092,6.981 -8.091,6.971 -8.09,6.96 -8.09,6.95 -8.09,5.75 -8.09,5.74 -8.091,5.729 -8.092,5.719 -8.094,5.708 -8.097,5.698 -8.1,5.688 -8.103,5.678 -8.107,5.669 -8.112,5.659 -8.117,5.65 -8.122,5.641 -8.128,5.632 -8.135,5.624 -8.141,5.616 -8.149,5.609 -8.156,5.601 -8.164,5.595 -8.172,5.588 -8.181,5.582 -8.19,5.577 -8.199,5.572 -8.209,5.567 -8.218,5.563 -8.228,5.56 -8.238,5.557 -8.248,5.554 -8.259,5.552 -8.269,5.551 -8.28,5.55 -11.29,5.55 -11.29,7.15 -8.28,7.15
  Top Layer region: -8.269,19.849 -8.259,19.848 -8.248,19.846 -8.238,19.843 -8.228,19.84 -8.218,19.837 -8.209,19.833 -8.199,19.828 -8.19,19.823 -8.181,19.818 -8.172,19.812 -8.164,19.805 -8.156,19.799 -8.149,19.791 -8.141,19.784 -8.135,19.776 -8.128,19.768 -8.122,19.759 -8.117,19.75 -8.112,19.741 -8.107,19.731 -8.103,19.722 -8.1,19.712 -8.097,19.702 -8.094,19.692 -8.092,19.681 -8.091,19.671 -8.09,19.66 -8.09,19.65 -8.09,18.45 -8.09,18.44 -8.091,18.429 -8.092,18.419 -8.094,18.408 -8.097,18.398 -8.1,18.388 -8.103,18.378 -8.107,18.369 -8.112,18.359 -8.117,18.35 -8.122,18.341 -8.128,18.332 -8.135,18.324 -8.141,18.316 -8.149,18.309 -8.156,18.301 -8.164,18.295 -8.172,18.288 -8.181,18.282 -8.19,18.277 -8.199,18.272 -8.209,18.267 -8.218,18.263 -8.228,18.26 -8.238,18.257 -8.248,18.254 -8.259,18.252 -8.269,18.251 -8.28,18.25 -11.29,18.25 -11.29,19.85 -8.28,19.85
  Top Layer region: -8.848,-23.331 -8.806,-23.334 -8.765,-23.34 -8.724,-23.347 -8.683,-23.357 -8.643,-23.369 -8.603,-23.383 -8.565,-23.399 -8.527,-23.417 -8.49,-23.437 -8.454,-23.459 -8.42,-23.483 -8.387,-23.508 -8.355,-23.535 -8.324,-23.564 -8.295,-23.595 -8.268,-23.627 -8.243,-23.66 -8.219,-23.694 -8.197,-23.73 -8.177,-23.767 -8.159,-23.805 -8.143,-23.843 -8.129,-23.883 -8.117,-23.923 -8.107,-23.964 -8.1,-24.005 -8.094,-24.046 -8.091,-24.088 -8.09,-24.13 -8.091,-24.172 -8.094,-24.214 -8.1,-24.255 -8.107,-24.296 -8.117,-24.337 -8.129,-24.377 -8.143,-24.417 -8.159,-24.455 -8.177,-24.493 -8.197,-24.53 -8.219,-24.566 -8.243,-24.6 -8.268,-24.633 -8.295,-24.665 -8.324,-24.696 -8.355,-24.725 -8.387,-24.752 -8.42,-24.777 -8.454,-24.801 -8.49,-24.823 -8.527,-24.843 -8.565,-24.861 -8.603,-24.877 -8.643,-24.891 -8.683,-24.903 -8.724,-24.913 -8.765,-24.92 -8.806,-24.926 -8.848,-24.929 -8.89,-24.93 -11.29,-24.93 -11.29,-23.33 -8.89,-23.33
  Top Layer region: -8.848,-20.791 -8.806,-20.794 -8.765,-20.8 -8.724,-20.807 -8.683,-20.817 -8.643,-20.829 -8.603,-20.843 -8.565,-20.859 -8.527,-20.877 -8.49,-20.897 -8.454,-20.919 -8.42,-20.943 -8.387,-20.968 -8.355,-20.995 -8.324,-21.024 -8.295,-21.055 -8.268,-21.087 -8.243,-21.12 -8.219,-21.154 -8.197,-21.19 -8.177,-21.227 -8.159,-21.265 -8.143,-21.303 -8.129,-21.343 -8.117,-21.383 -8.107,-21.424 -8.1,-21.465 -8.094,-21.506 -8.091,-21.548 -8.09,-21.59 -8.091,-21.632 -8.094,-21.674 -8.1,-21.715 -8.107,-21.756 -8.117,-21.797 -8.129,-21.837 -8.143,-21.877 -8.159,-21.915 -8.177,-21.953 -8.197,-21.99 -8.219,-22.026 -8.243,-22.06 -8.268,-22.093 -8.295,-22.125 -8.324,-22.156 -8.355,-22.185 -8.387,-22.212 -8.42,-22.237 -8.454,-22.261 -8.49,-22.283 -8.527,-22.303 -8.565,-22.321 -8.603,-22.337 -8.643,-22.351 -8.683,-22.363 -8.724,-22.373 -8.765,-22.38 -8.806,-22.386 -8.848,-22.389 -8.89,-22.39 -11.29,-22.39 -11.29,-20.79 -8.89,-20.79
  Top Layer region: -8.848,-15.711 -8.806,-15.714 -8.765,-15.72 -8.724,-15.727 -8.683,-15.737 -8.643,-15.749 -8.603,-15.763 -8.565,-15.779 -8.527,-15.797 -8.49,-15.817 -8.454,-15.839 -8.42,-15.863 -8.387,-15.888 -8.355,-15.915 -8.324,-15.944 -8.295,-15.975 -8.268,-16.007 -8.243,-16.04 -8.219,-16.074 -8.197,-16.11 -8.177,-16.147 -8.159,-16.185 -8.143,-16.223 -8.129,-16.263 -8.117,-16.303 -8.107,-16.344 -8.1,-16.385 -8.094,-16.426 -8.091,-16.468 -8.09,-16.51 -8.091,-16.552 -8.094,-16.594 -8.1,-16.635 -8.107,-16.676 -8.117,-16.717 -8.129,-16.757 -8.143,-16.797 -8.159,-16.835 -8.177,-16.873 -8.197,-16.91 -8.219,-16.946 -8.243,-16.98 -8.268,-17.013 -8.295,-17.045 -8.324,-17.076 -8.355,-17.105 -8.387,-17.132 -8.42,-17.157 -8.454,-17.181 -8.49,-17.203 -8.527,-17.223 -8.565,-17.241 -8.603,-17.257 -8.643,-17.271 -8.683,-17.283 -8.724,-17.293 -8.765,-17.3 -8.806,-17.306 -8.848,-17.309 -8.89,-17.31 -11.29,-17.31 -11.29,-15.71 -8.89,-15.71
  Top Layer region: -8.848,-13.171 -8.806,-13.174 -8.765,-13.18 -8.724,-13.187 -8.683,-13.197 -8.643,-13.209 -8.603,-13.223 -8.565,-13.239 -8.527,-13.257 -8.49,-13.277 -8.454,-13.299 -8.42,-13.323 -8.387,-13.348 -8.355,-13.375 -8.324,-13.404 -8.295,-13.435 -8.268,-13.467 -8.243,-13.5 -8.219,-13.534 -8.197,-13.57 -8.177,-13.607 -8.159,-13.645 -8.143,-13.683 -8.129,-13.723 -8.117,-13.763 -8.107,-13.804 -8.1,-13.845 -8.094,-13.886 -8.091,-13.928 -8.09,-13.97 -8.091,-14.012 -8.094,-14.054 -8.1,-14.095 -8.107,-14.136 -8.117,-14.177 -8.129,-14.217 -8.143,-14.257 -8.159,-14.295 -8.177,-14.333 -8.197,-14.37 -8.219,-14.406 -8.243,-14.44 -8.268,-14.473 -8.295,-14.505 -8.324,-14.536 -8.355,-14.565 -8.387,-14.592 -8.42,-14.617 -8.454,-14.641 -8.49,-14.663 -8.527,-14.683 -8.565,-14.701 -8.603,-14.717 -8.643,-14.731 -8.683,-14.743 -8.724,-14.753 -8.765,-14.76 -8.806,-14.766 -8.848,-14.769 -8.89,-14.77 -11.29,-14.77 -11.29,-13.17 -8.89,-13.17
  Top Layer region: -8.848,-10.631 -8.806,-10.634 -8.765,-10.64 -8.724,-10.647 -8.683,-10.657 -8.643,-10.669 -8.603,-10.683 -8.565,-10.699 -8.527,-10.717 -8.49,-10.737 -8.454,-10.759 -8.42,-10.783 -8.387,-10.808 -8.355,-10.835 -8.324,-10.864 -8.295,-10.895 -8.268,-10.927 -8.243,-10.96 -8.219,-10.994 -8.197,-11.03 -8.177,-11.067 -8.159,-11.105 -8.143,-11.143 -8.129,-11.183 -8.117,-11.223 -8.107,-11.264 -8.1,-11.305 -8.094,-11.346 -8.091,-11.388 -8.09,-11.43 -8.091,-11.472 -8.094,-11.514 -8.1,-11.555 -8.107,-11.596 -8.117,-11.637 -8.129,-11.677 -8.143,-11.717 -8.159,-11.755 -8.177,-11.793 -8.197,-11.83 -8.219,-11.866 -8.243,-11.9 -8.268,-11.933 -8.295,-11.965 -8.324,-11.996 -8.355,-12.025 -8.387,-12.052 -8.42,-12.077 -8.454,-12.101 -8.49,-12.123 -8.527,-12.143 -8.565,-12.161 -8.603,-12.177 -8.643,-12.191 -8.683,-12.203 -8.724,-12.213 -8.765,-12.22 -8.806,-12.226 -8.848,-12.229 -8.89,-12.23 -11.29,-12.23 -11.29,-10.63 -8.89,-10.63
  Top Layer region: -8.848,-8.091 -8.806,-8.094 -8.765,-8.1 -8.724,-8.107 -8.683,-8.117 -8.643,-8.129 -8.603,-8.143 -8.565,-8.159 -8.527,-8.177 -8.49,-8.197 -8.454,-8.219 -8.42,-8.243 -8.387,-8.268 -8.355,-8.295 -8.324,-8.324 -8.295,-8.355 -8.268,-8.387 -8.243,-8.42 -8.219,-8.454 -8.197,-8.49 -8.177,-8.527 -8.159,-8.565 -8.143,-8.603 -8.129,-8.643 -8.117,-8.683 -8.107,-8.724 -8.1,-8.765 -8.094,-8.806 -8.091,-8.848 -8.09,-8.89 -8.091,-8.932 -8.094,-8.974 -8.1,-9.015 -8.107,-9.056 -8.117,-9.097 -8.129,-9.137 -8.143,-9.177 -8.159,-9.215 -8.177,-9.253 -8.197,-9.29 -8.219,-9.326 -8.243,-9.36 -8.268,-9.393 -8.295,-9.425 -8.324,-9.456 -8.355,-9.485 -8.387,-9.512 -8.42,-9.537 -8.454,-9.561 -8.49,-9.583 -8.527,-9.603 -8.565,-9.621 -8.603,-9.637 -8.643,-9.651 -8.683,-9.663 -8.724,-9.673 -8.765,-9.68 -8.806,-9.686 -8.848,-9.689 -8.89,-9.69 -11.29,-9.69 -11.29,-8.09 -8.89,-8.09
  Top Layer region: -8.848,-3.011 -8.806,-3.014 -8.765,-3.02 -8.724,-3.027 -8.683,-3.037 -8.643,-3.049 -8.603,-3.063 -8.565,-3.079 -8.527,-3.097 -8.49,-3.117 -8.454,-3.139 -8.42,-3.163 -8.387,-3.188 -8.355,-3.215 -8.324,-3.244 -8.295,-3.275 -8.268,-3.307 -8.243,-3.34 -8.219,-3.374 -8.197,-3.41 -8.177,-3.447 -8.159,-3.485 -8.143,-3.523 -8.129,-3.563 -8.117,-3.603 -8.107,-3.644 -8.1,-3.685 -8.094,-3.726 -8.091,-3.768 -8.09,-3.81 -8.091,-3.852 -8.094,-3.894 -8.1,-3.935 -8.107,-3.976 -8.117,-4.017 -8.129,-4.057 -8.143,-4.097 -8.159,-4.135 -8.177,-4.173 -8.197,-4.21 -8.219,-4.246 -8.243,-4.28 -8.268,-4.313 -8.295,-4.345 -8.324,-4.376 -8.355,-4.405 -8.387,-4.432 -8.42,-4.457 -8.454,-4.481 -8.49,-4.503 -8.527,-4.523 -8.565,-4.541 -8.603,-4.557 -8.643,-4.571 -8.683,-4.583 -8.724,-4.593 -8.765,-4.6 -8.806,-4.606 -8.848,-4.609 -8.89,-4.61 -11.29,-4.61 -11.29,-3.01 -8.89,-3.01
  Top Layer region: -8.848,-0.471 -8.806,-0.474 -8.765,-0.48 -8.724,-0.487 -8.683,-0.497 -8.643,-0.509 -8.603,-0.523 -8.565,-0.539 -8.527,-0.557 -8.49,-0.577 -8.454,-0.599 -8.42,-0.623 -8.387,-0.648 -8.355,-0.675 -8.324,-0.704 -8.295,-0.735 -8.268,-0.767 -8.243,-0.8 -8.219,-0.834 -8.197,-0.87 -8.177,-0.907 -8.159,-0.945 -8.143,-0.983 -8.129,-1.023 -8.117,-1.063 -8.107,-1.104 -8.1,-1.145 -8.094,-1.186 -8.091,-1.228 -8.09,-1.27 -8.091,-1.312 -8.094,-1.354 -8.1,-1.395 -8.107,-1.436 -8.117,-1.477 -8.129,-1.517 -8.143,-1.557 -8.159,-1.595 -8.177,-1.633 -8.197,-1.67 -8.219,-1.706 -8.243,-1.74 -8.268,-1.773 -8.295,-1.805 -8.324,-1.836 -8.355,-1.865 -8.387,-1.892 -8.42,-1.917 -8.454,-1.941 -8.49,-1.963 -8.527,-1.983 -8.565,-2.001 -8.603,-2.017 -8.643,-2.031 -8.683,-2.043 -8.724,-2.053 -8.765,-2.06 -8.806,-2.066 -8.848,-2.069 -8.89,-2.07 -11.29,-2.07 -11.29,-0.47 -8.89,-0.47
  Top Layer region: -8.848,2.069 -8.806,2.066 -8.765,2.06 -8.724,2.053 -8.683,2.043 -8.643,2.031 -8.603,2.017 -8.565,2.001 -8.527,1.983 -8.49,1.963 -8.454,1.941 -8.42,1.917 -8.387,1.892 -8.355,1.865 -8.324,1.836 -8.295,1.805 -8.268,1.773 -8.243,1.74 -8.219,1.706 -8.197,1.67 -8.177,1.633 -8.159,1.595 -8.143,1.557 -8.129,1.517 -8.117,1.477 -8.107,1.436 -8.1,1.395 -8.094,1.354 -8.091,1.312 -8.09,1.27 -8.091,1.228 -8.094,1.186 -8.1,1.145 -8.107,1.104 -8.117,1.063 -8.129,1.023 -8.143,0.983 -8.159,0.945 -8.177,0.907 -8.197,0.87 -8.219,0.834 -8.243,0.8 -8.268,0.767 -8.295,0.735 -8.324,0.704 -8.355,0.675 -8.387,0.648 -8.42,0.623 -8.454,0.599 -8.49,0.577 -8.527,0.557 -8.565,0.539 -8.603,0.523 -8.643,0.509 -8.683,0.497 -8.724,0.487 -8.765,0.48 -8.806,0.474 -8.848,0.471 -8.89,0.47 -11.29,0.47 -11.29,2.07 -8.89,2.07
  Top Layer region: -8.848,4.609 -8.806,4.606 -8.765,4.6 -8.724,4.593 -8.683,4.583 -8.643,4.571 -8.603,4.557 -8.565,4.541 -8.527,4.523 -8.49,4.503 -8.454,4.481 -8.42,4.457 -8.387,4.432 -8.355,4.405 -8.324,4.376 -8.295,4.345 -8.268,4.313 -8.243,4.28 -8.219,4.246 -8.197,4.21 -8.177,4.173 -8.159,4.135 -8.143,4.097 -8.129,4.057 -8.117,4.017 -8.107,3.976 -8.1,3.935 -8.094,3.894 -8.091,3.852 -8.09,3.81 -8.091,3.768 -8.094,3.726 -8.1,3.685 -8.107,3.644 -8.117,3.603 -8.129,3.563 -8.143,3.523 -8.159,3.485 -8.177,3.447 -8.197,3.41 -8.219,3.374 -8.243,3.34 -8.268,3.307 -8.295,3.275 -8.324,3.244 -8.355,3.215 -8.387,3.188 -8.42,3.163 -8.454,3.139 -8.49,3.117 -8.527,3.097 -8.565,3.079 -8.603,3.063 -8.643,3.049 -8.683,3.037 -8.724,3.027 -8.765,3.02 -8.806,3.014 -8.848,3.011 -8.89,3.01 -11.29,3.01 -11.29,4.61 -8.89,4.61
  silkscreen extent -12.29,-25.5 10.5,26.8, body extent -10.5,-25.5 10.5,26.8, height 3.73
OMRON-B3F-4055_V [mm] "THD, 4-Leads, Body 12x12mm"
  rect 1.75x1.75 hole 1.25: 1(-6.25,2.5)
  round 1.75 hole 1.25: 2(6.25,2.5) 3(-6.25,-2.5) 4(6.25,-2.5)
  round 1.55 hole 1.85 unplated: MH1(0,4.5) MH2(0,-4.5)
  silkscreen extent -7.8,-6 6,6, body extent -6,-6 6,6, height 7.5
RESC3116X65X40ML10T20 [mm] "Chip Resistor, 2-Leads, Body 3.10x1.60mm, IPC Low Density"
  rect 1.25x1.8 smd: 1(-1.525,0) 2(1.525,0)
  silkscreen extent -0.5,-0.8 0.5,0.8, body extent -1.6,-0.85 1.6,0.85, height 0.65